# Altium PCB LED CTRL BOARD.PcbDoc
Units mm, origin at the board's own origin, x right, y up, seen from the top; angles counter-clockwise.
Board outline 52 x 52 mm, 2 copper layers (Top Layer, Bottom Layer); 38 components, 25 nets, 166 pads, 0 vias.
Unrouted connection lines stored in the file: 101.
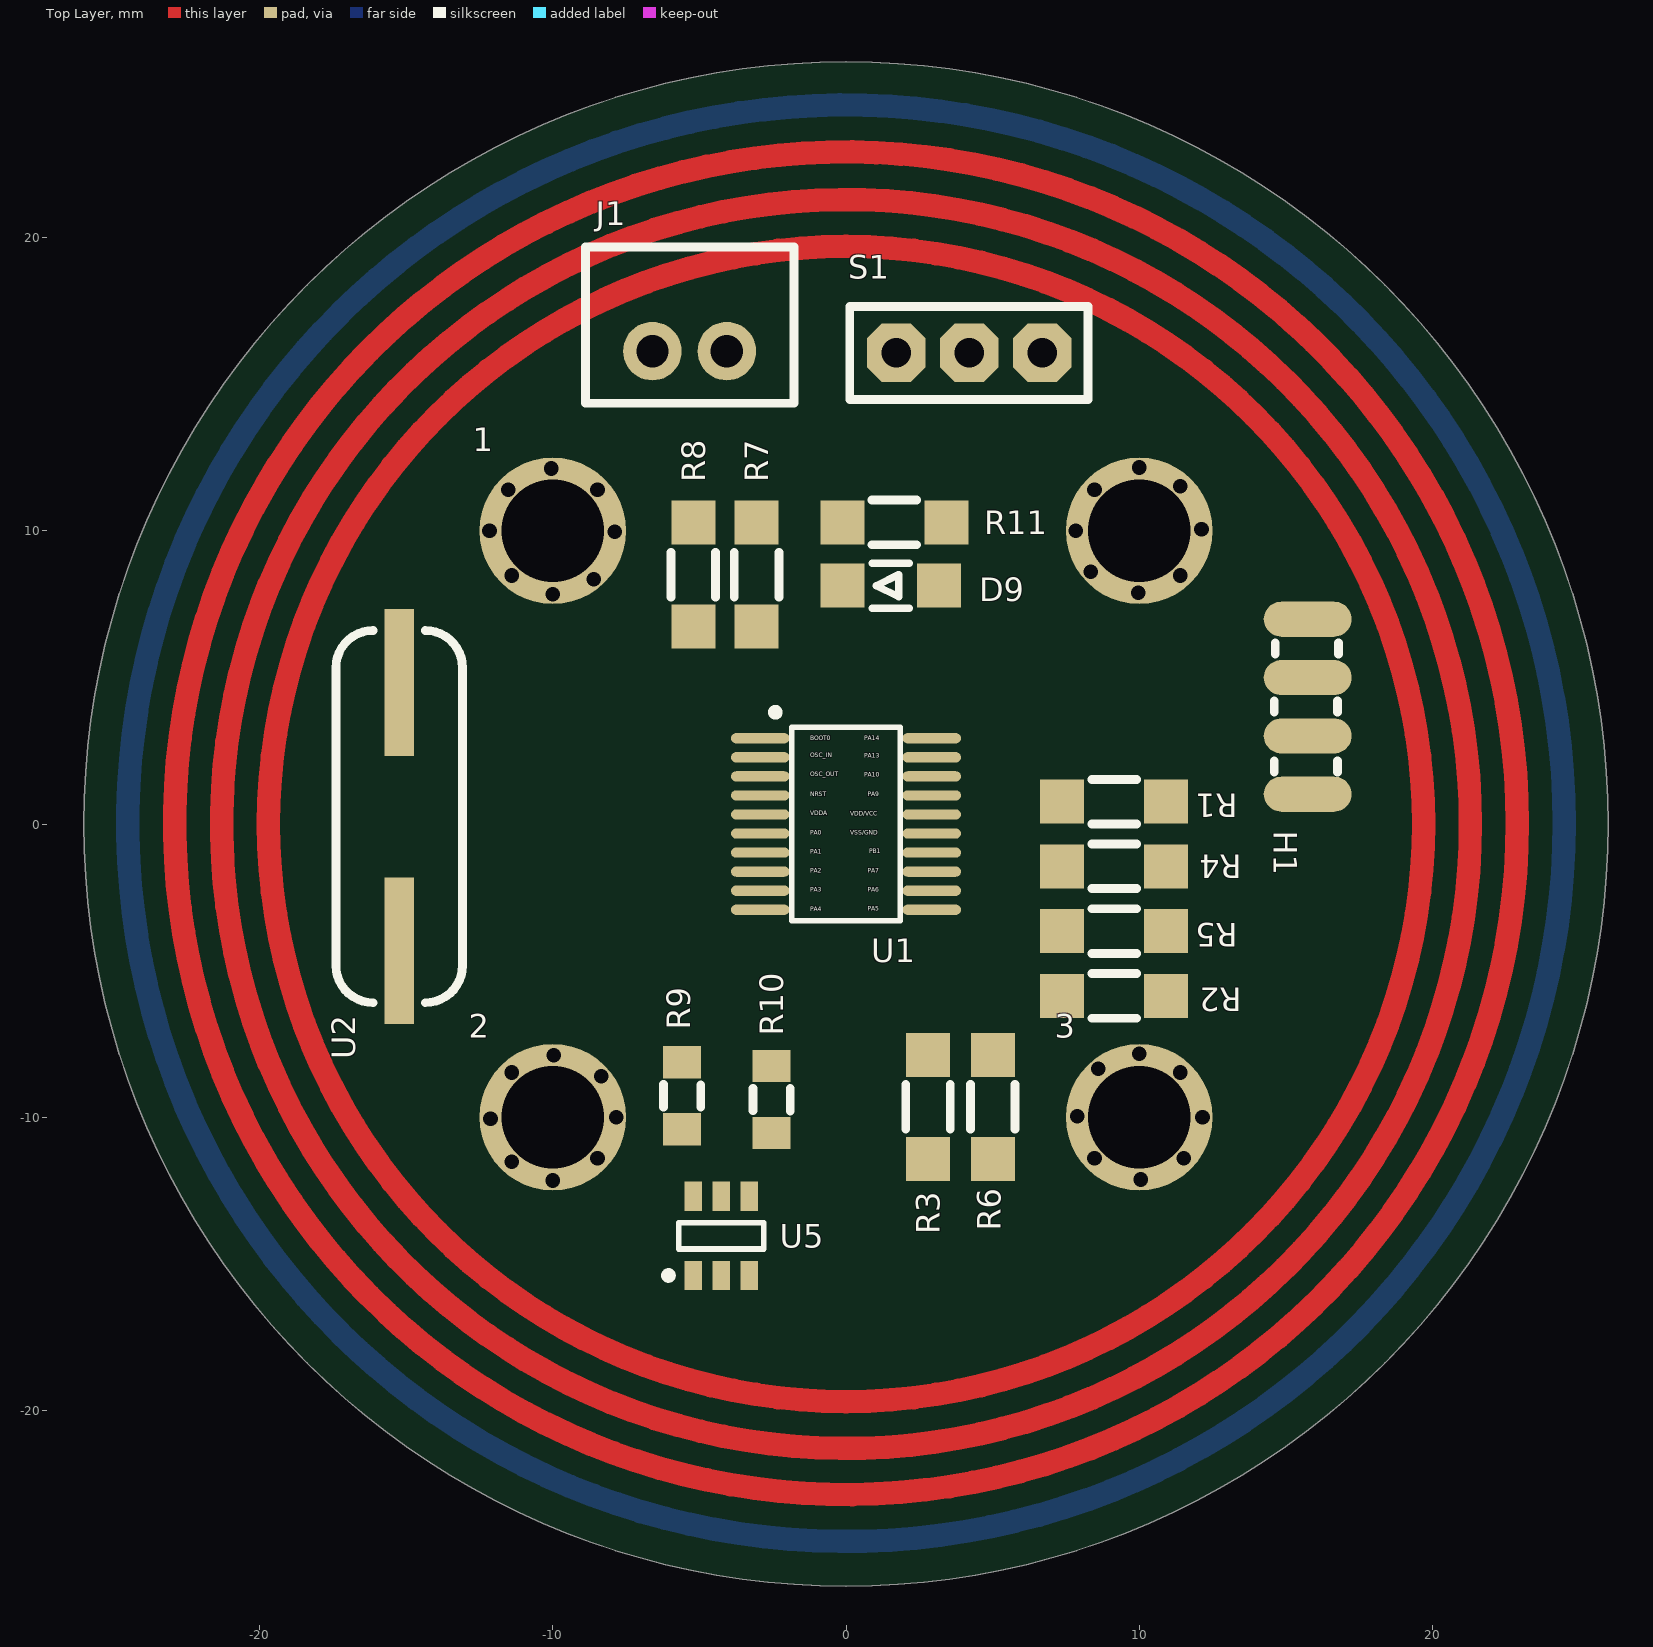
[diagram p0: Top Layer view]
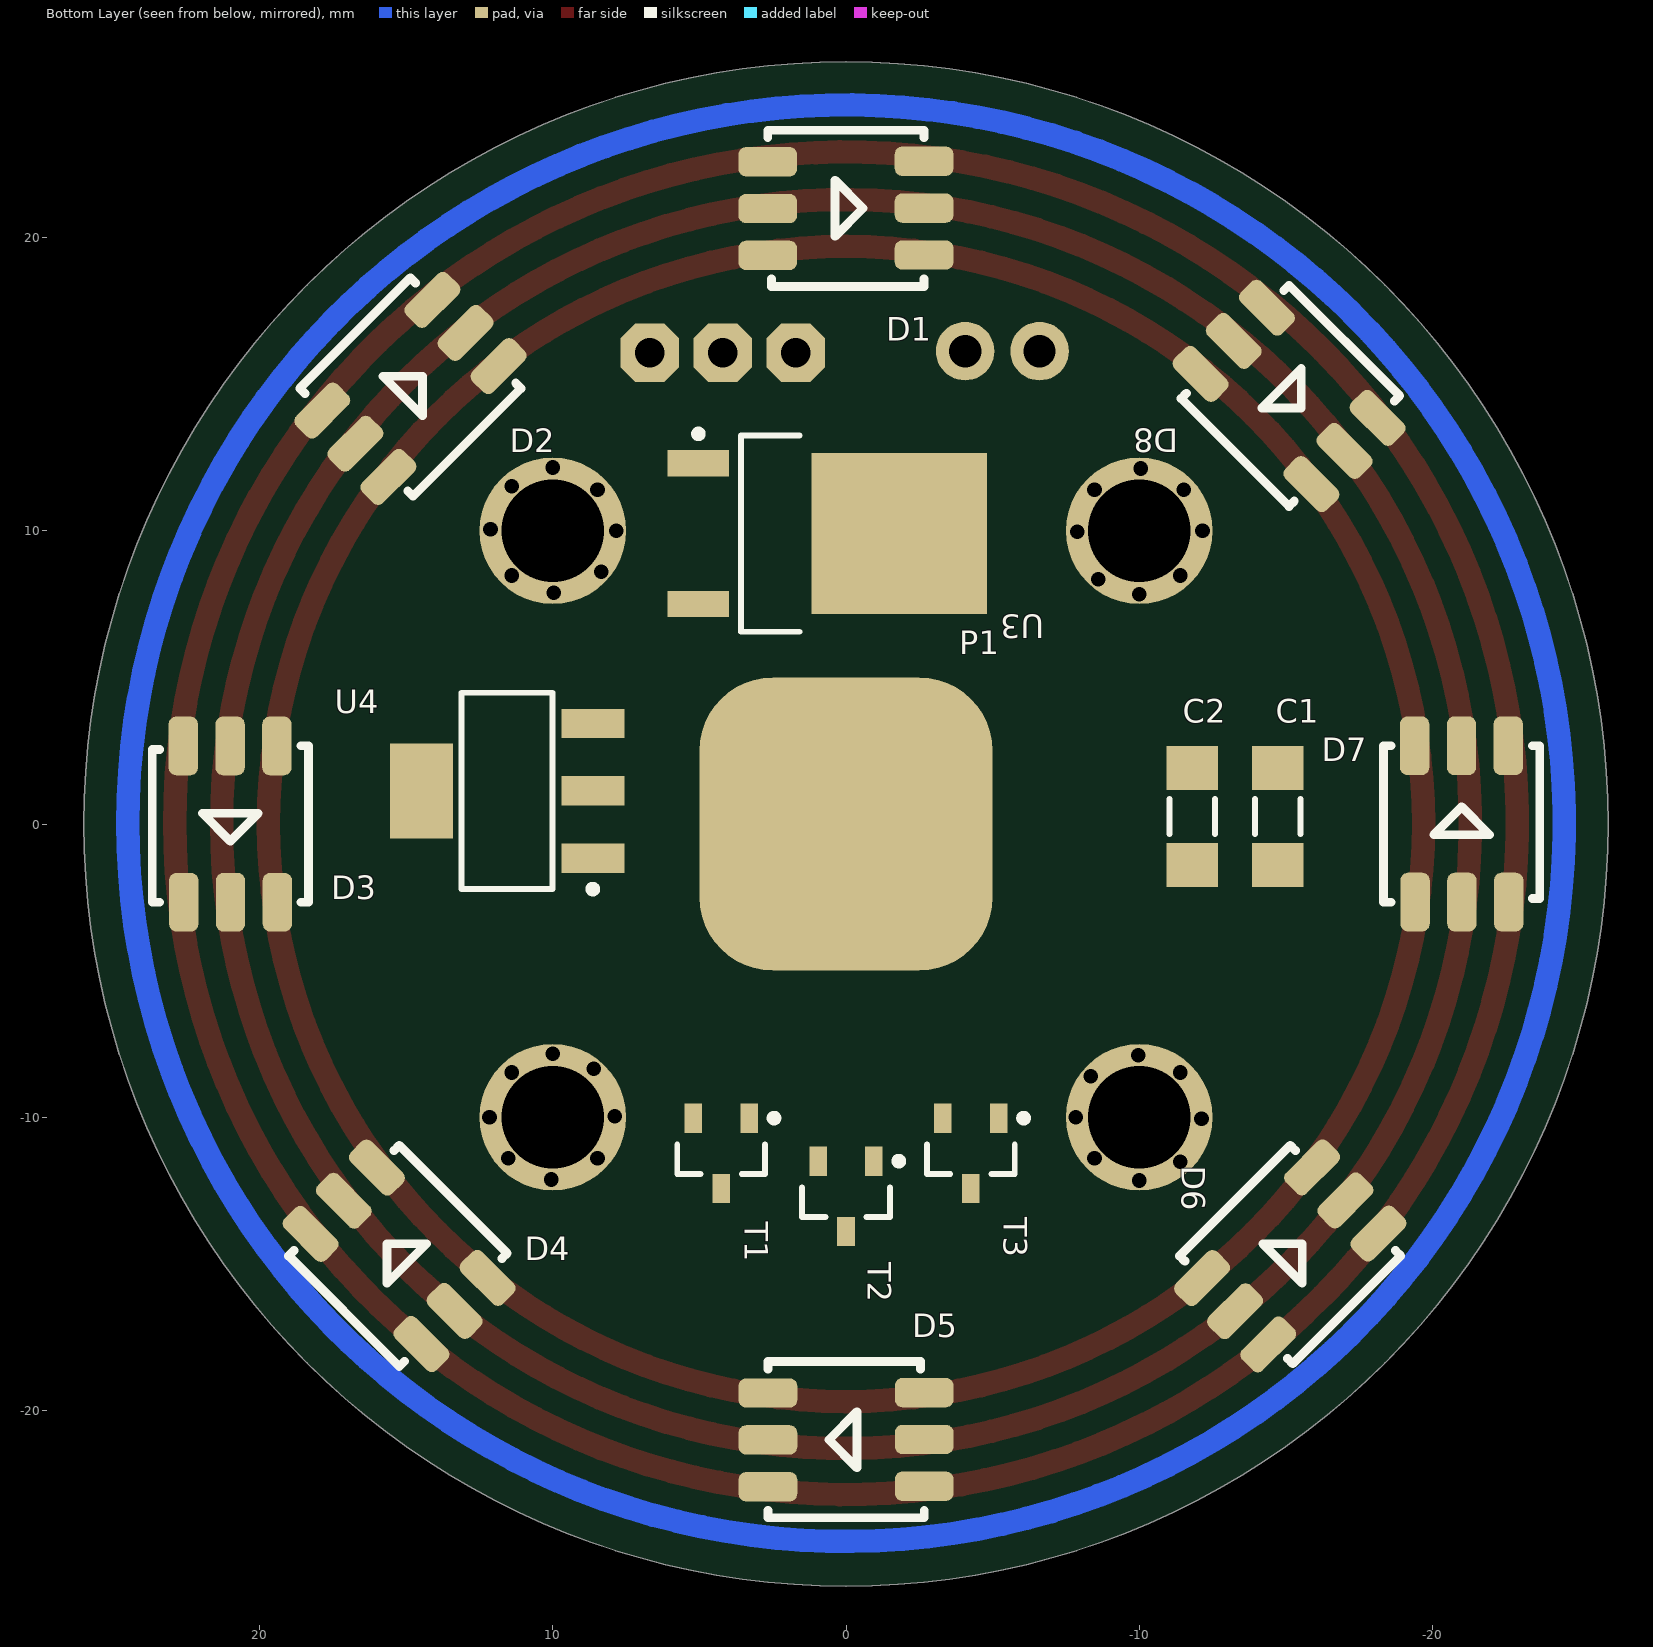
[diagram p1: Bottom Layer view, seen from below]

## Layer stack, top to bottom
Top Solder: solder mask 0.0102, Solder Resist, Dk 3.5
Top Layer: signal copper 0.0356
Dielectric 1: dielectric 0.32, FR-4, Dk 4.8
Bottom Layer: signal copper 0.0356
Bottom Solder: solder mask 0.0102, Solder Resist, Dk 3.5

## Board outline
-26,0 ccw(c0,0) 0,-26 ccw(c0,0) 26,0 ccw(c0,0) 0,26 ccw(c0,0)

## Design rules (kind name [scope] priority, off if disabled: settings)
Clearance [All] p1: gap=0.25 ignorepadtopadclearanceinfootprint=FALSE
PolygonConnect [All] p1: connectstyle=Relief reliefconductorwidth=0.254 reliefentries=4 polygonreliefangle="90 Angle" airgapwidth=0.254
RoutingVias [All] p1: holewidth=0.711 width=1.27 viastyle="Through Hole" minholewidth=0.711 minwidth=1.27 maxholewidth=0.711 maxwidth=1.27
SolderMaskExpansion [All] p1: expansion=0.102 istentingtop=FALSE
Width [All] p1: maxlimit=10 minlimit=0.254 preferedwidth=0.254
30 further rules are at their usual default settings.

## Classes and differential pairs
component class "LED Control Board": C1 C2 D1 D2 D3 D4 D5 D6 D7 D8 D9 H1 J1 P1 R1 R2 R3 R4 R5 R6 R7 R8 R10 R11 S1 T1 T2 T3 U1 U2 U3 U4 U5

## Components (designator, comment, footprint, x,y, rotation, side; value= is the part's Value field where it differs from the comment)
1 "Comment" SCREW -10,10 r90 top
2 "Comment" SCREW -10,-10 r180 top
3 "Comment" SCREW 10,-10 r270 top
C1 "CAP" CAP1206 -14.732,0.254 r270 bottom
C2 "CAP" CAP1206 -11.811,0.254 r270 bottom
D1 "RGB" "RGB LED SMD" 0.005,21 r180 bottom
D2 "RGB" "RGB LED SMD" 14.859,14.859 r135 bottom
D3 "RGB" "RGB LED SMD" 21,0 r270 bottom
D4 "RGB" "RGB LED SMD" 15.24,-14.732 r45 bottom
D5 "RGB" "RGB LED SMD" -0.005,-21 r0 bottom
D6 "RGB" "RGB LED SMD" -15.15,-14.731 r135 bottom
D7 "RGB" "RGB LED SMD" -21,0 r90 bottom
D8 "RGB" "RGB LED SMD" -15.113,14.605 r225 bottom
D9 "LED" "LED RED 1206" 1.524,8.128 r180 top
H1 "PROG" PROGRAMER 15.748,4.064 r90 top
J1 "XH2" "XH 2pin" -5.334,17.018 r0 top
P1 "Touch" Touch 0,0 r180 bottom locked
R1 "RES" RES1206 9.144,0.762 r180 top
R2 "RES" RES1206 9.144,-5.865 r0 top
R3 "RES" RES1206 2.797,-9.652 r270 top
R4 "RES" RES1206 9.144,-1.445 r0 top
R5 "RES" RES1206 9.144,-3.655 r0 top
R6 "RES" RES1206 5.006,-9.652 r270 top
R7 "RES" RES1206 -3.048,8.509 r90 top
R8 "RES" RES1206 -5.207,8.509 r90 top
R9 "RES" RES805 -5.588,-9.271 r90 top
R10 "RES" RES805 -2.54,-9.398 r90 top
R11 "RES" RES1206 1.651,10.287 r0 top
S1 "SW" SS-12D00G3 4.191,17.653 r180 top
T1 "AO3400A" AO3400A 4.257,-11.233 r270 bottom
T2 "AO3400A" AO3400A 0,-12.7 r270 bottom
T3 "AO3400A" AO3400A -4.257,-11.233 r270 bottom
U1 "STM32F030F4P6" STM32F030F4P6 0,0 r0 top locked
U2 "Oscilator" "Crystal Oscilator" -15.24,0.254 r90 top
U3 "7805" "7805 (SOT-252)" 0.635,9.906 r180 bottom
U4 "1117" AMS1117 11.561,1.129 r0 bottom
U5 "TTP223" TTP223 -4.257,-14.05 r90 top
? "Comment" SCREW 10,10 r0 top

## Footprints (in the part's own frame and the unit in brackets; to place one, negate y for a bottom-side part, rotate by r counter-clockwise, add the part's x,y. Pads: shape width x height; smd on the part's side, far side on the other; paste and mask are expansions set on the pad)
"7805 (SOT-252)" [mm] "D-PAK, 3-Pads, Body 6.25x6.71mm (max), IPC Medium Density"
  rect 2.1x0.9 smd: 1(-4.4,2.4) 3(-4.4,-2.4)
  rect 6x5.5 smd: 4(2.45,0)
  silkscreen extent -4.52,-3.35 -0.95,3.52, body extent -5.06,-3.35 4.85,3.35, height 2.45
AMS1117 [mm] "SOT223, 4-Leads, Body 6.30x7.00mm (avg), Pitch 2.30mm, IPC Medium Density"
  rect 2.15x1 smd: 1(-2.925,2.3) 2(-2.925,0) 3(-2.925,-2.3)
  rect 2.15x3.25 smd: 4(2.925,0)
  silkscreen extent -3.05,-3.35 1.55,3.47, body extent -3.5,-3.35 3.5,3.35, height 1.65
AO3400A [mm] "SOT23, 3-Leads, Body 2.90x2.45mm, Pitch 0.95mm, IPC Medium Density"
  rect 1x0.6 smd: 1(-1.2,0.95) 2(-1.2,-0.95) 3(1.2,0)
  silkscreen extent -1.32,-1.5 0.7,1.92, body extent -1.3,-1.5 1.3,1.5, height 1.1
CAP1206 [mm] "Chip Capacitor, 2-Leads, Body 3.20x1.60mm, IPC Medium Density"
  rect 1.5x1.75 smd: 1(-1.651,0) 2(1.651,0)
  silkscreen extent -0.6,-0.77 0.6,0.77, body extent -1.6,-0.8 1.6,0.8, height 1
"Crystal Oscilator" [mm]
  rect 5x1 smd: 1(-4.572,0) 2(4.572,0)
  silkscreen extent -6.35,-2.16 6.35,2.16, body extent -6.5,-2.35 6.5,2.35, height 4.21
"LED RED 1206" [mm]
  rect 1.5x1.5 smd: 1(-1.651,0) 2(1.651,0)
  silkscreen extent -0.64,-0.76 0.64,0.76, body extent -1.63,-0.83 1.64,0.82, height 0.9
PROGRAMER [mm]
  oval 1.2x3 smd: 1(-3.048,0) 2(-1.058,0) 3(0.931,0) 4(2.921,0)
  silkscreen extent -2.29,-1.05 2.12,1.14
RES805 [mm]
  rect 1.1x1.3 smd: 1(-1.143,0) 2(1.143,0)
  silkscreen extent -0.39,-0.64 0.38,0.64, body extent -1,-0.6 1,0.6, height 0.48
RES1206 [mm]
  rect 1.5x1.5 smd: 1(-1.778,0) 2(1.778,0)
  silkscreen extent -0.76,-0.76 0.76,0.76, body extent -1.58,-0.82 1.58,0.82, height 0.53
"RGB LED SMD" [mm]
  rrect50% 2x1 smd: 1(-2.662,1.588) 2(-2.662,-0.008) 3(-2.662,-1.604) 4(2.667,-1.591) 5(2.667,0.007) 6(2.667,1.605)
  silkscreen extent -2.67,-2.67 2.67,2.67, body extent -2.69,-2.5 2.71,2.5, height 1.62
SCREW [mm]
  round 5 hole 3.5: 1(0,0)
  round 0 hole 0.5: ""(-2.159,0) ""(-1.651,-1.397) ""(-1.524,1.397) ""(-0.031,-2.11) ""(0,2.159) ""(1.397,1.524) ""(1.397,-1.524) ""(2.128,0.059)
SS-12D00G3 [mm]
  oct 2x2 hole 1: 1(-2.498,1.583) 2(-0.011,1.583) 3(2.477,1.583)
  silkscreen extent -4.06,0 4.06,3.18, body extent -4.29,-0.25 4.29,3.46, height 7.05
STM32F030F4P6 [mm] "TSOP, 20-Leads, Body 6.50x4.40mm, Pitch 0.65mm, IPC Medium Density"
  oval 2x0.35 smd: 1(-2.925,2.925) 2(-2.925,2.275) 3(-2.925,1.625) 4(-2.925,0.975) 5(-2.925,0.325) 6(-2.925,-0.325) 7(-2.925,-0.975) 8(-2.925,-1.625) 9(-2.925,-2.275) 10(-2.925,-2.925) 11(2.925,-2.925) 12(2.925,-2.275) 13(2.925,-1.625) 14(2.925,-0.975) 15(2.925,-0.325) 16(2.925,0.325) 17(2.925,0.975) 18(2.925,1.625) 19(2.925,2.275) 20(2.925,2.925)
  silkscreen extent -2.54,-3.3 1.85,3.93, body extent -3.15,-3.3 3.15,3.3, height 1.2
Touch [mm]
  rrect50% 10x10 smd: 1(0,0)
TTP223 [mm] "SOT23, 6-Leads, Body 2.90x2.85mm, Pitch 0.95mm, IPC Medium Density"
  rect 1x0.6 smd: 1(-1.35,0.95) 2(-1.35,0) 3(-1.35,-0.95) 4(1.35,-0.95) 5(1.35,0) 6(1.35,0.95)
  silkscreen extent -1.47,-1.45 0.45,1.92, body extent -1.48,-1.45 1.48,1.45, height 1.26
"XH 2pin" [mm]
  round 2 hole 1.1: 1(-1.27,-0.889) 2(1.27,-0.889)
  silkscreen extent -3.56,-2.67 3.56,2.67, body extent -3.7,-2.88 3.7,2.88, height 7

## Part data
C1 C2: library part CAP1206, "Capacitor SMD 1206"
D1 D2 D3 D4 D5 D6 D7 D8: library part "RGB LED SMD", "RGB LED SMD"
D9: library part "LED SMD 1206", "LED SMD 1206"
H1: library part Programmer
J1: library part "XH 2PIN", "XH Connector 2pins"
P1: "Touch Pad"
R1 R2 R3 R4 R5 R6 R7 R8 R11: library part RES1206, "RESISTOR SMD"
R9 R10: library part RES805, "RESISTOR SMD"
S1: library part SS-12D00G3, "SWITCH SPDT"
U2: library part Crystal, "Crystal Oscilator 8MHz"
U3: library part "7805 (SOT-252)", "5v Regulator"
U4: library part AMS1117, "3.3v Regulator"
U5: "Touch Drive IC"

## Nets (pads, with @x,y where several pads share a name; then routed paths per layer and width w, separated by ;. In a path a pad name is that pad's centre, name@x,y a point inside that pad or via, vN(x,y) a via of type N, cw(c..) or ccw(c..) an arc to the next point about the centre after c; other vN are vias at no path point)
+5: C1.2 D1.1 D1.2 D1.3 D2.1 D2.2 D2.3 D3.1 D3.2 D3.3 D4.1 D4.2 D4.3 D5.1 D5.2 D5.3 D6.1 D6.2 D6.3 D7.1 D7.2 D7.3 D8.1 D8.2 D8.3 U3.3 U4.3 | length 153.9
  Bottom Layer w0.8: 24.5,0.027 ccw(c0,0.027) 24.5,0.027
B: D1.4 D2.4 D3.4 D4.4 D5.4 D6.4 D7.4 D8.4 T3.3
BOOT0: R7.1 U1.1
G: 3. 3.1 D1.6 D2.6 D3.6 D4.6 D5.6 D6.6 D7.6 D8.6 T2.3
GND: C1.1 C2.1 H1.4 J1.1 R4.2 R5.2 R6.2 R7.2 R11.2 T1.2 T2.2 T3.2 U1.15 U3.4 U4.1 U5.2
LED_B: R3.2 U1.12
LED_G: R2.2 U1.13
LED_R: R1.1 U1.14
NetD9_2: D9.2 R11.1
NetJ1_2: J1.2 S1.2
NetP1_1: P1.1 U5.3
NetR1_2: R1.2 R4.1 T1.1
NetR2_1: R2.1 R5.1 T2.1
NetR3_1: R3.1 R6.1 T3.1
NetR9_1: R9.1 U5.6
NetR10_1: R10.1 U5.4
NetS1_1: S1.1 U3.1
NRST: 1. 1.1 R8.1 U1.4
OSC_IN: U1.2 U2.2
OSC_OUT: U1.3 U2.1
R: D1.5 D2.5 D3.5 D4.5 D5.5 D6.5 D7.5 D8.5 T1.3
SWCLK: H1.3 U1.20
SWIO: H1.2 U1.19
TOUCH1: U1.6 U5.1
VCC: 2. 2.1 C2.2 D9.1 H1.1 R8.2 R9.2 R10.2 U1.5 U1.16 U4.2 U4.4 U5.5
pads on no net: ?. ?.1 S1.3 U1.7 U1.8 U1.9 U1.10 U1.11 U1.17 U1.18
copper on no net: | length 545.4
  Top Layer w0.8: 22.9,0.027 ccw(c0,0.027) 22.9,0.027 ; 22.9,0.027 ccw(c0,0.027) 22.9,0.027 ; 19.7,0 ccw(c0,0) 19.7,0 ; 21.3,0 ccw(c0,0) 21.3,0

## Silkscreen, mask and mechanical layers (free items; w line width, h text height)
Mechanical 1:
  circle w0.3: c0,0 r26

## Text inside footprints (layer, text, board x,y; h text height)
U1: Top Overlay "PA5" at 0.74,-2.964 h0.15; Top Overlay "PA6" at 0.74,-2.311 h0.15; Top Overlay "PA7" at 0.74,-1.658 h0.15; Top Overlay "PB1" at 0.79,-1.005 h0.15; Top Overlay "VSS/GND" at 0.14,-0.37 h0.15; Top Overlay "PA9" at 0.74,0.955 h0.15; Top Overlay "PA10" at 0.615,1.608 h0.15; Top Overlay "PA13" at 0.615,2.262 h0.15; Top Overlay "PA14" at 0.615,2.861 h0.15; Top Overlay "PA4" at -1.225,-2.972 h0.15; Top Overlay "PA3" at -1.225,-2.319 h0.15; Top Overlay "PA2" at -1.225,-1.666 h0.15; Top Overlay "PA1" at -1.225,-1.013 h0.15; Top Overlay "PA0" at -1.225,-0.36 h0.15; Top Overlay "VDDA" at -1.225,0.293 h0.15; Top Overlay "NRST" at -1.225,0.946 h0.15; Top Overlay "OSC_OUT" at -1.225,1.625 h0.15; Top Overlay "OSC_IN" at -1.225,2.278 h0.15; Top Overlay "BOOT0" at -1.225,2.853 h0.15; Top Overlay "VDD/VCC" at 0.14,0.282 h0.15